# Altium PCB AMC_Single_uBIF.PcbDoc (part 1 of 2)
Units mm, origin at the board's own origin, x right, y up, seen from the top; angles counter-clockwise.
Board outline 54.63 x 82.6 mm, 4 copper layers (TOP, GND, PWR, BTM), stack 1.562 mm thick; 31 components, 112 nets, 322 pads, 154 vias.
Unrouted connection lines stored in the file: 186.
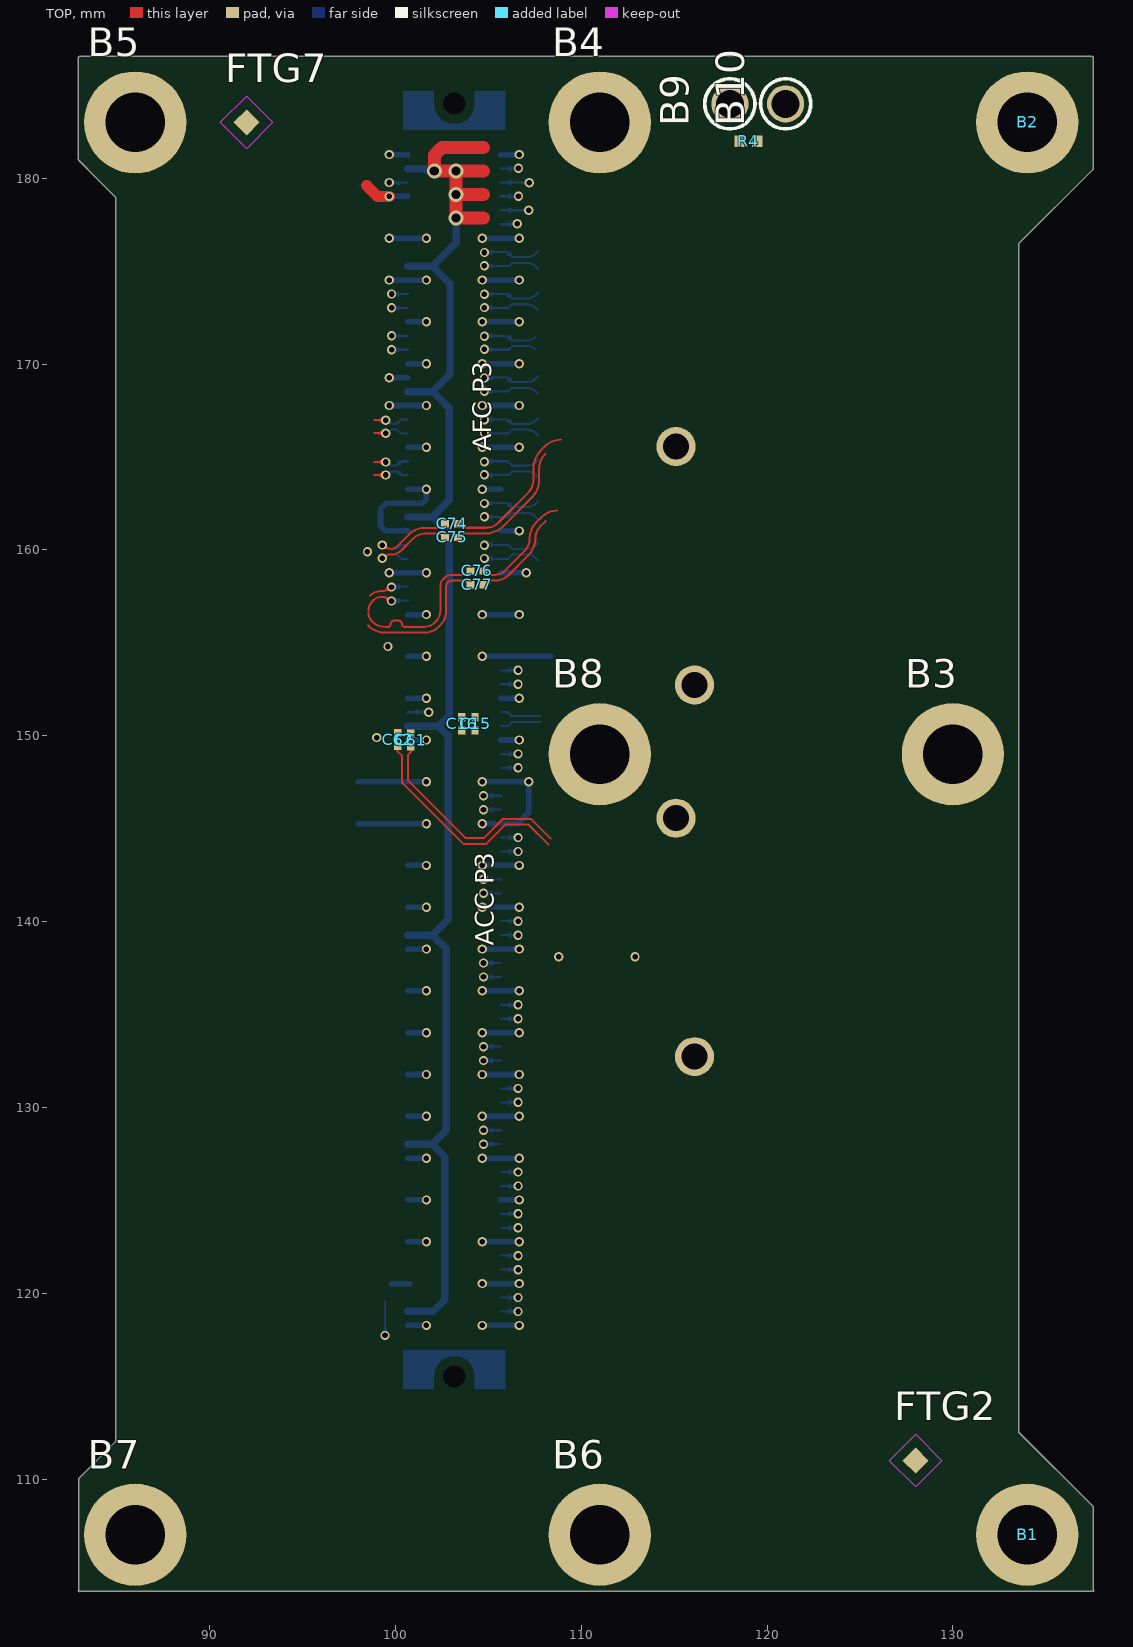
[diagram p0: TOP view]
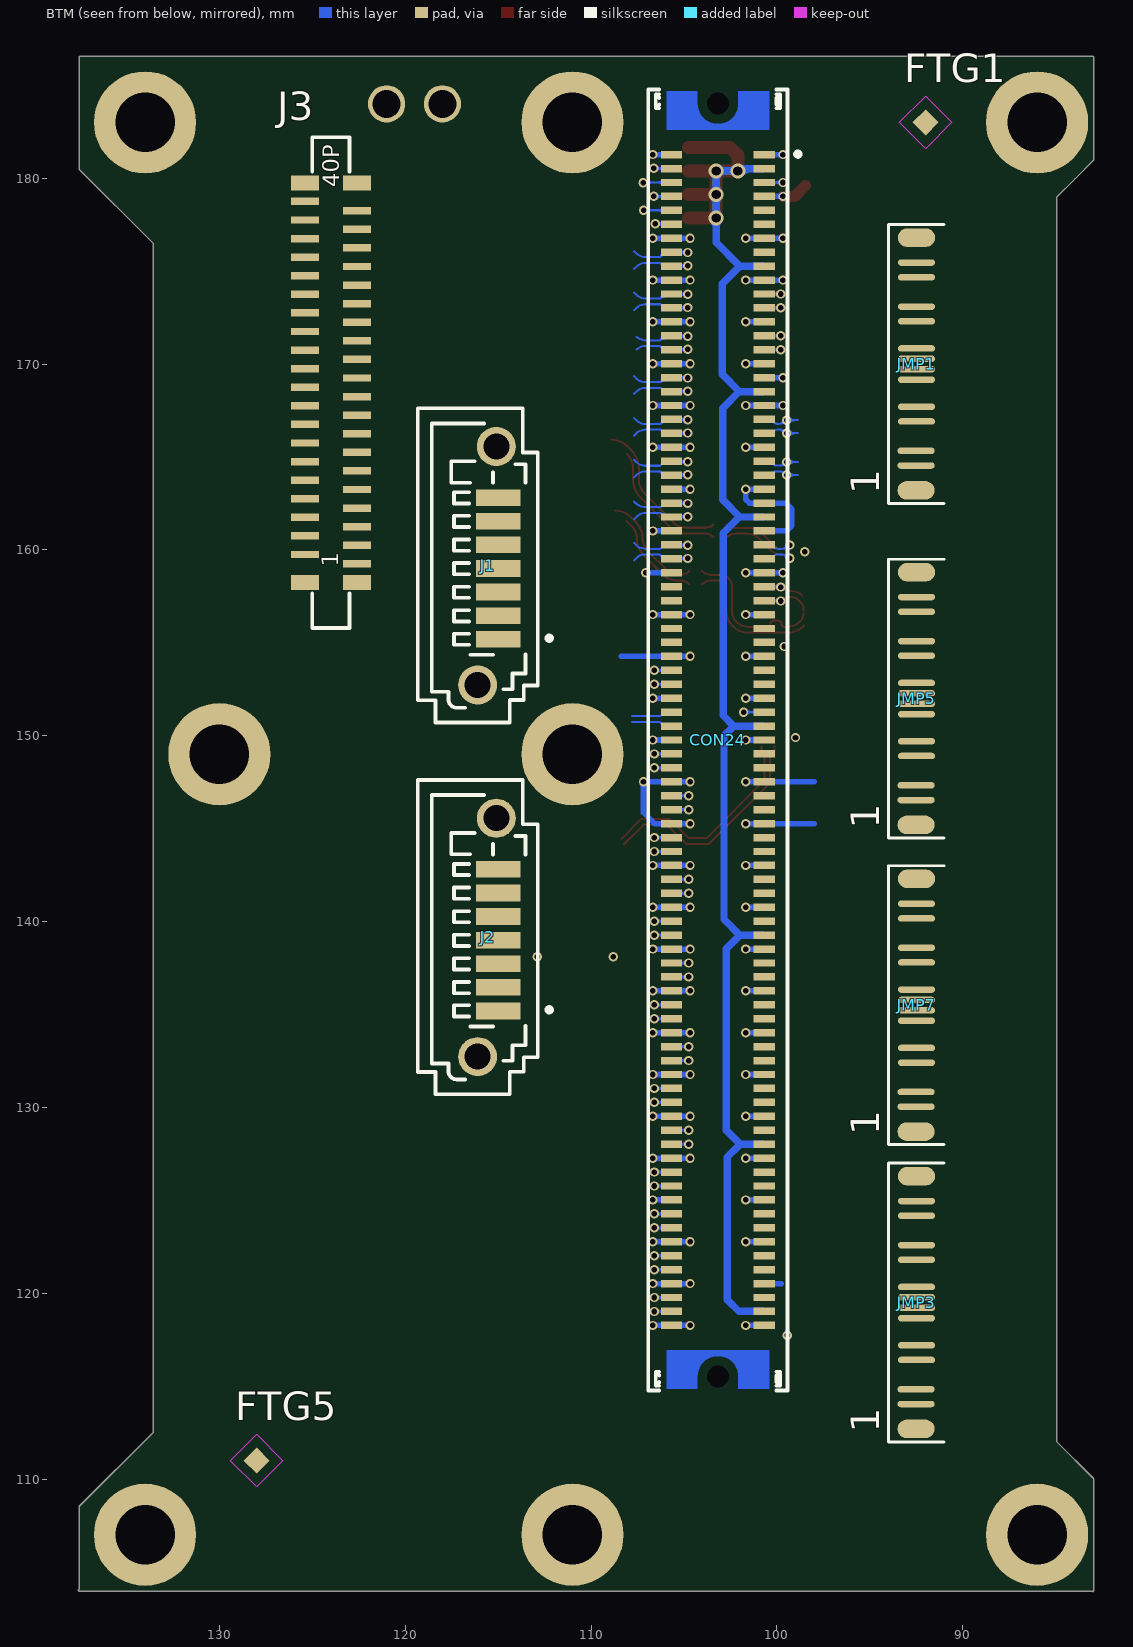
[diagram p1: BTM view, seen from below]
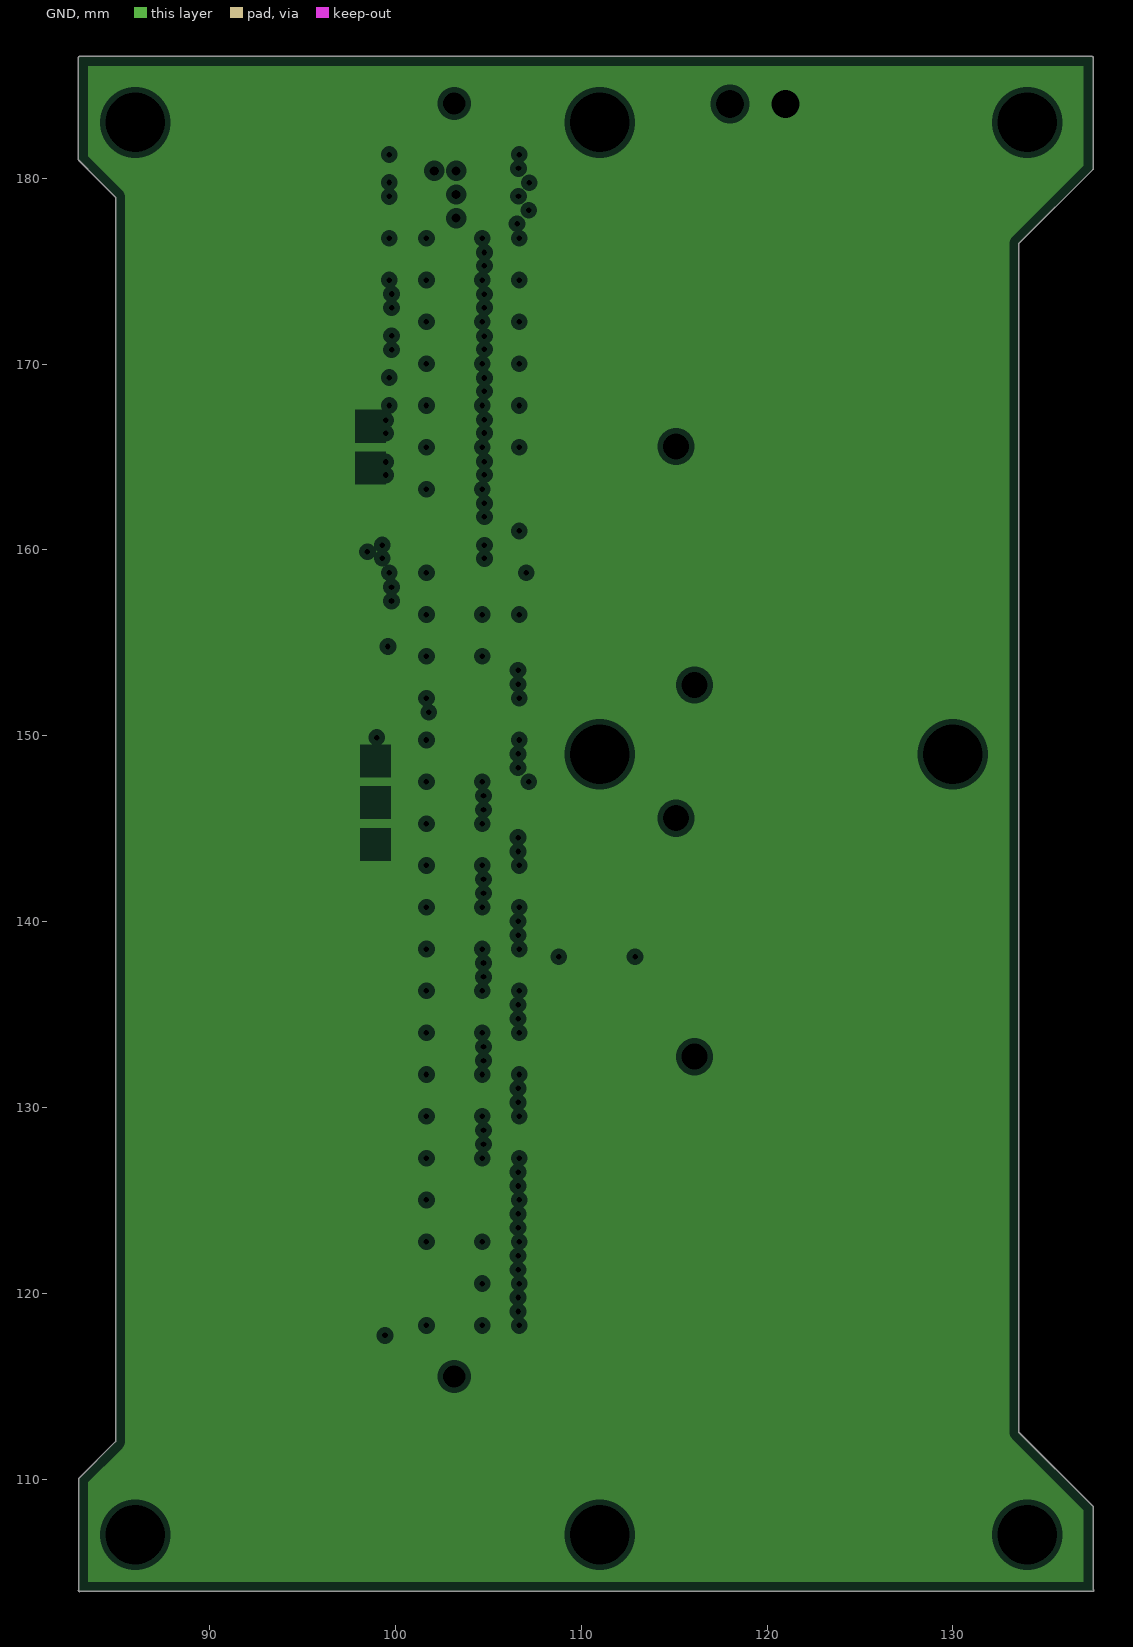
[diagram p2: GND, clearances drawn from the general rule]
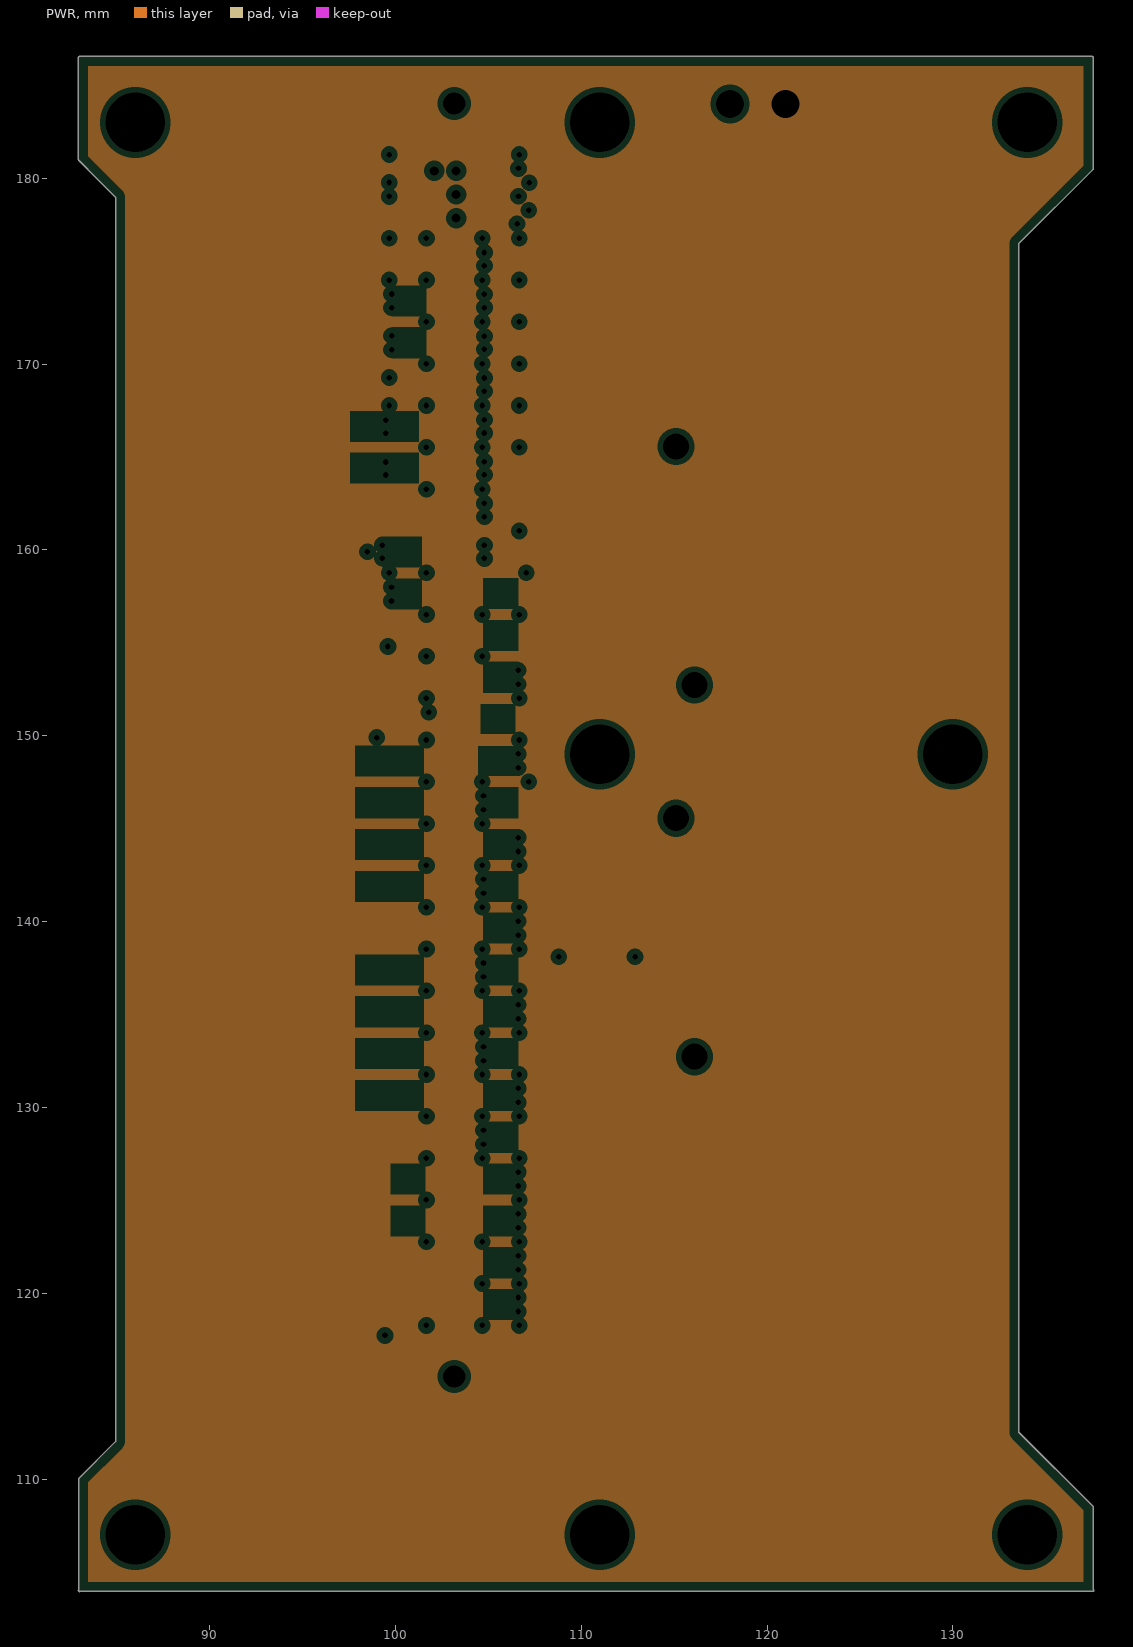
[diagram p3: PWR, clearances drawn from the general rule]

## Layer stack, top to bottom
Top Solder: solder mask 0.012, Solder Resist, Dk 3.5
TOP: signal copper 0.053
Dielectric1: core 0.11, FR4 IT180-A / S1000-2 0.135mm 18u/18u, Dk 4.5
GND: plane copper 0.018, net GND
Dielectric2: prepreg 1.2, FR-4, Dk 4.5
PWR: plane copper 0.018, net GND
Dielectric3: core 0.11, FR4 IT180-A / S1000-2 0.135mm 18u/18u, Dk 4.5
BTM: signal copper 0.053
Bottom Solder: solder mask 0.012, Solder Resist, Dk 3.5

## Board outline
83.032,103.961 cw(c83,104) 82.961,104.032 82.961,110.011 cw(c83.011,110.011) 82.976,110.047 82.975,110.047 84.95,112.021 84.95,178.979 83.965,179.964 cw(c84,180) 83.964,179.964 cw(c84,180) 83.964,179.965 83.965,179.964 82.964,180.964 82.965,180.964 cw(c83,181) 82.95,181 82.95,186.5 cw(c83,186.5) 83,186.55 137.5,186.55 cw(c137.5,186.5) 137.55,186.5 137.55,180.5 cw(c137.5,180.5) 137.535,180.464 137.536,180.464 133.55,176.479 133.55,112.521 137.536,108.536 137.535,108.536 cw(c137.5,108.5) 137.55,108.5 137.55,104.064 137.568,104.047 137.567,104.047 cw(c137.532,104.011) 137.582,104.011 cw(c137.532,104.011) 137.532,103.961

## Design rules (kind name [scope] priority, off if disabled: settings)
AcuteAngle [All] p1: minimum=5.00000000000000E+0001 checktracksonly=FALSE
Clearance Pads_v_pads [InPadClass('All pads') vs InPadClass('All pads')] p1: gap=0.025
Clearance poly_vs_impedance [InNetClass('SE') or InNetClass('DE') vs inpoly] p2: gap=0.5
Clearance DE&SE_in_room [(InNetClass('DE') OR InNetClass('SE')) and iswire and (WithinRoom('QSFPA') OR WithinRoom('QSFPB') OR WithinRoom('SFP0_AFC') OR WithinRoom('SFP0_ACC') OR WithinRoom('SFP1_AFC') OR WithinRoom('SFP1_ACC') OR WithinRoom('CLK') OR WithinRoom('ETH_CON') OR WithinRoom('IO') OR WithinRoom('USB_UART') OR WithinRoom('U_RPTR_1') OR WithinRoom('U_RPTR_2') OR WithinRoom('U_RPTR_3'))] p3: gap=0.15
Clearance DE_vs_DE [InNetClass('DE') and (IsWire) vs InNetClass('DE') and (IsWire)] p4: gap=0.4
Clearance DE_vs_12V [(InDifferentialPairClass('All Differential Pairs')) vs InNet('P12V')] p5: gap=0.4
Clearance DE_vs_rest [InNetClass('DE') and iswire vs iswire and (not InNetClass('DE'))] p6: gap=0.4
Clearance Clearance_ICs [WithinRoom('CPU') OR WithinRoom('ETH_PHY') vs NOT InPoly] p7: gap=0.12
Clearance SE_vs_rest [InNetClass('SE') and iswire vs iswire or inpoly] p8: gap=0.4
Clearance P12V_Clerance [(InNet('ACC_P12V') or InNet('AFC_P12V') or InNet('P12V'))] p9: gap=0.25
Clearance poly_vs_con [InComponent('CON21') vs inpoly] p10: gap=0.3
Clearance poly_vs_power_poly [InPoly AND (InNet('P3V3') OR InNet('P12V') OR InNet('QSFP_P3V3') OR InNet('SFP_P3V3')) vs InPoly] p11: gap=0.4
Clearance poly_vs_rest [All vs inpoly] p12: gap=0.254
Clearance [All] p13: gap=0.12
ComponentClearance [All] p1: gap=0 collisioncheckmode=3 verticalgap=0 showdistances=FALSE
DiffPairsRouting [All] p1: maxlimit=0.2 minlimit=0.2 mostfreqgap=0.2 toplayer_minwidth=0.381 toplayer_maxwidth=0.381 toplayer_prefwidth=0.381 bottomlayer_minwidth=0.381 bottomlayer_maxwidth=0.381 bottomlayer_prefwidth=0.381 maxuncoupledlength=12.7
Height [All] p1: minheight=0 maxheight=30 prefheight=25.4
HoleSize [All] p1: absolutevalues=TRUE maxlimit=10 minlimit=0.3 maxpercent=80.000 minpercent=20.000
HoleToHoleClearance [All] p1: gap=0.2 allowstackedmicrovias=FALSE
MinimumAnnularRing [All] p1: minimumring=0.1
MinimumSolderMaskSliver [All] p1: minsoldermaskwidth=0.051
PlaneClearance V_SE [InNetClass('SE')] p1: clearance=0.3
PlaneClearance V_DE [InNetClass('DE')] p2: clearance=0.31
PlaneClearance REST_Clearance [All] p3: clearance=0.3
PlaneConnect PlaneConnect_pad [InPadClass('All pads')] p1: planeconnectstyle=Relief reliefexpansion=0.2 reliefentries=4 reliefconductorwidth=0.5 reliefairgap=0.2
PlaneConnect [All] p2: planeconnectstyle=Direct reliefexpansion=0.508 reliefentries=4 reliefconductorwidth=0.254 reliefairgap=0.254
PolygonConnect PolygonConnect_Vias [IsVIa] p1: connectstyle=Direct reliefconductorwidth=0.254 reliefentries=4 polygonreliefangle="90 Angle" airgapwidth=0.254
PolygonConnect [All] p2: connectstyle=Relief reliefconductorwidth=0.25 reliefentries=4 polygonreliefangle="90 Angle" airgapwidth=0.254
RoomDefinition AMC_BOX_Backplane [InComponentClass('AMC_BOX_Backplane')] p1: confinementstyle=ConfineIn formatcopy=TRUE lockcomponents=FALSE outline 1213.076,953.689 1230.296,953.689 1230.296,957.779 1213.076,957.779
RoomDefinition AFC [InComponentClass('AFC')] p2: confinementstyle=ConfineIn formatcopy=TRUE lockcomponents=FALSE outline 92,95 110,95 110,102 92,102
RoutingVias [All] p1: holewidth=0.3 width=0.5 viastyle="Through Hole" minholewidth=0.3 minwidth=0.5 maxholewidth=2 maxwidth=2
SilkToSilkClearance [All] p1: silktosilkclearance=0.025
SilkToSolderMaskClearance SilkscreenOverComponentPads [IsPad] p1: minsilkscreentomaskgap=0.025 clearancetoexposedcopper=TRUE
SolderMaskExpansion [All] p1: expansion=0.051
ViasUnderSMD [All] p1: allowed=FALSE
Width POWER_WIDTH [InNetClass('POWER')] p1: maxlimit=10 minlimit=0.2 preferedwidth=0.2 minimp=50.000000 maximp=50.000000 favimp=50.000000
Width SE [InNetClass('SE')] p2: maxlimit=0.13 minlimit=0.13 preferedwidth=0.13 minimp=50.000000 maximp=50.000000 favimp=50.000000
Width DE100 [(InDifferentialPairClass('All Differential Pairs'))] p3: maxlimit=0.11 minlimit=0.11 preferedwidth=0.11 minimp=50.000000 maximp=50.000000 favimp=50.000000
Width [All] p4: maxlimit=10 minlimit=0.11 preferedwidth=0.2
20 further rules are at their usual default settings.

## Classes and differential pairs
net class DE: BA4_CLK_N FCLKA_N FCLKA_P RX0_N RX0_P RX1_N RX1_P RX2_C_N RX2_C_P RX2_N RX2_P RX3_C_N RX3_C_P RX3_N RX3_P RX4_N RX4_P RX5_N RX5_P RX6_N RX6_P RX7_N RX7_P TCLKA_N TCLKA_P TCLKB_N TCLKB_P TX0_N TX0_P TX1_N TX1_P TX2_C_N TX2_C_P TX2_N TX2_P TX3_C_N TX3_C_P TX3_N TX3_P TX4_N TX4_P TX5_N TX5_P TX6_N TX6_P TX7_N TX7_P
component class AFC: B1 B2 C15 C16 C61 C62 C74 C75 C76 C77 CON24 J1 J2
net class AMC_CTRL: ENABLE# PS0# PS1# SCL_L SDA_L
net class SATA: RX2_C_N RX2_C_P RX2_N RX2_P RX3_C_N RX3_C_P RX3_N RX3_P TX2_C_N TX2_C_P TX2_N TX2_P TX3_C_N TX3_C_P TX3_N TX3_P
net class SFP: FCLKA_N FCLKA_P RX0_N RX0_P RX1_N RX1_P RX4_N RX4_P RX5_N RX5_P RX6_N RX6_P RX7_N RX7_P TCLKA_N TCLKA_P TCLKB_N TCLKB_P TX0_N TX0_P TX1_N TX1_P TX4_N TX4_P TX5_N TX5_P TX6_N TX6_P TX7_N TX7_P
component class AMC_BOX_Backplane: B3 B4 B5 B6 B7 B8 B9 B10 CON1 CON12 CON28 FTG1 FTG2 FTG5 FTG7 J3 JMP1 JMP3 JMP5 JMP7 R4
differential pair FCLKA: +FCLKA_P -FCLKA_N
differential pair RX0: +RX0_P -RX0_N
differential pair RX1: +RX1_P -RX1_N
differential pair RX2_C: +RX2_C_P -RX2_C_N
differential pair RX2: +RX2_P -RX2_N
differential pair RX4: +RX4_P -RX4_N
differential pair RX5: +RX5_P -RX5_N
differential pair RX6: +RX6_P -RX6_N
differential pair RX7: +RX7_P -RX7_N
differential pair RX8: +RX8_P -RX8_N
differential pair RX9: +RX9_P -RX9_N
differential pair RX10: +RX10_P -RX10_N
differential pair RX11: +RX11_P -RX11_N
differential pair RX12: +RX12_P -RX12_N
differential pair RX13: +RX13_P -RX13_N
differential pair RX14: +RX14_P -RX14_N
differential pair RX15: +RX15_P -RX15_N
differential pair RX17: +RX17_P -RX17_N
differential pair RX18: +RX18_P -RX18_N
differential pair RX19: +RX19_P -RX19_N
differential pair RX20: +RX20_P -RX20_N
differential pair TCLKA: +TCLKA_P -TCLKA_N
differential pair TCLKB: +TCLKB_P -TCLKB_N
differential pair TCLKC: +TCLKC_P -TCLKC_N
differential pair TCLKD: +TCLKD_P -TCLKD_N
differential pair TX0: +TX0_P -TX0_N
differential pair TX1: +TX1_P -TX1_N
differential pair TX2_C: +TX2_C_P -TX2_C_N
differential pair TX2: +TX2_P -TX2_N
differential pair TX4: +TX4_P -TX4_N
differential pair TX5: +TX5_P -TX5_N
differential pair TX6: +TX6_P -TX6_N
differential pair TX7: +TX7_P -TX7_N
differential pair TX8: +TX8_P -TX8_N
differential pair TX9: +TX9_P -TX9_N
differential pair TX10: +TX10_P -TX10_N
differential pair TX11: +TX11_P -TX11_N
differential pair TX12: +TX12_P -TX12_N
differential pair TX13: +TX13_P -TX13_N
differential pair TX14: +TX14_P -TX14_N
differential pair TX15: +TX15_P -TX15_N
differential pair TX17: +TX17_P -TX17_N
differential pair TX18: +TX18_P -TX18_N
differential pair TX19: +TX19_P -TX19_N
differential pair TX20: +TX20_P -TX20_N
differential pair RX3_C: +RX3_C_P -RX3_C_N
differential pair RX3: +RX3_P -RX3_N
differential pair TX3_C: +TX3_C_P -TX3_C_N
differential pair TX3: +TX3_P -TX3_N

## Components (designator, comment, footprint, x,y, rotation, side; value= is the part's Value field where it differs from the comment)
B1 "Plated Hole" MTG320_550 134,107 r0 top
B2 "Plated Hole" MTG320_550 134,183 r0 top
B3 "Plated Hole" MTG320_550 130,149 r0 top
B4 "Plated Hole" MTG320_550 111,183 r0 top
B5 "Plated Hole" MTG320_550 86,183 r0 top
B6 "Plated Hole" MTG320_550 111,107 r0 top
B7 "Plated Hole" MTG320_550 86,107 r0 top
B8 "Plated Hole" MTG320_550 111,149 r0 top
B9 "Plated Hole" c200h150 118,184 r90 top
B10 "Plated Hole" c200h150 121,184 r90 top
C15 "100nF" CAPC0603X33N 104.288,150.649 r90 top
C16 "100nF" CAPC0603X33N 103.577,150.649 r90 top
C61 "100nF" CAPC0603X33N 100.839,149.77 r90 top
C62 "100nF" CAPC0603X33N 100.128,149.795 r90 top
C74 "100nF" CAPC0603X33N 103.022,161.404 r180 top
C75 "100nF" CAPC0603X33N 103.022,160.667 r180 top
C76 "100nF" CAPC0603X33N 104.394,158.864 r180 top
C77 "100nF" CAPC0603X33N 104.394,158.127 r180 top
CON24 "SAMTEC_MTCA-085-02-S-DV-SMT-K-TR" SAMTEC_MTCA-085-02-S-DV-SMT-K-TR 103.174,149.77 r90 bottom locked
FTG1 "Use only in PCB" FIDUCIAL_TOP_S100-200 92,183 r90 bottom
FTG2 "Use only in PCB" FIDUCIAL_TOP_S100-200 128,111 r90 top
FTG5 "Use only in PCB" FIDUCIAL_TOP_S100-200 128,111 r90 bottom
FTG7 "Use only in PCB" FIDUCIAL_TOP_S100-200 92,183 r90 top
J1 "SATA" MOLEX_67800-5005 115,159 r90 bottom
J2 "SATA" MOLEX_67800-5005 115,139 r90 bottom
J3 "687340124422" 687340124422 124,169 r90 bottom
JMP1 "3M_Twinax_SL8801/12-10DA5-00" 3M_Twinax_SL8801/12-10DA5-00 92.5,170 r90 bottom
JMP3 "3M_Twinax_SL8801/12-10DA5-00" 3M_Twinax_SL8801/12-10DA5-00 92.5,119.5 r90 bottom
JMP5 "3M_Twinax_SL8801/12-10DA5-00" 3M_Twinax_SL8801/12-10DA5-00 92.5,152 r90 bottom
JMP7 "3M_Twinax_SL8801/12-10DA5-00" 3M_Twinax_SL8801/12-10DA5-00 92.5,135.5 r90 bottom
R4 "0" RESC1005X40N 119,182 r0 top

## Footprints (in the part's own frame and the unit in brackets; to place one, negate y for a bottom-side part, rotate by r counter-clockwise, add the part's x,y. Pads: shape width x height; smd on the part's side, far side on the other; paste and mask are expansions set on the pad)
3M_Twinax_SL8801/12-10DA5-00 [mm]
  oval 1x2 smd: 1(-6.8,0.011) 14(6.8,-0.011)
  oval 0.35x2 smd: 2(-5.46,0.011) 3(-4.67,0.011) 4(-3.09,-0.011) 5(-2.3,-0.011) 6(-0.84,-0.011) 7(-0.28,-0.011) 8(0.28,-0.011) 9(0.84,-0.011) 10(2.3,-0.011) 11(3.09,-0.011) 12(4.67,-0.011) 13(5.46,-0.011)
  silkscreen extent -7.5,-1.5 7.5,1.5
687340124422 [mm] "0.50 mm SMT ZIF Vertical, 40p"
  rect 0.4x1.5 smd: 1(-9.75,-1.4) 2(-9.25,1.4) 3(-8.75,-1.4) 4(-8.25,1.4) 5(-7.75,-1.4) 6(-7.25,1.4) 7(-6.75,-1.4) 8(-6.25,1.4) 9(-5.75,-1.4) 10(-5.25,1.4) 11(-4.75,-1.4) 12(-4.25,1.4) 13(-3.75,-1.4) 14(-3.25,1.4) 15(-2.75,-1.4) 16(-2.25,1.4) 17(-1.75,-1.4) 18(-1.25,1.4) 19(-0.75,-1.4) 20(-0.25,1.4) 21(0.25,-1.4) 22(0.75,1.4) 23(1.25,-1.4) 24(1.75,1.4) 25(2.25,-1.4) 26(2.75,1.4) 27(3.25,-1.4) 28(3.75,1.4) 29(4.25,-1.4) 30(4.75,1.4) 31(5.25,-1.4) 32(5.75,1.4) 33(6.25,-1.4) 34(6.75,1.4) 35(7.25,-1.4) 36(7.75,1.4) 37(8.25,-1.4) 38(8.75,1.4) 39(9.25,-1.4) 40(9.75,1.4)
  rect 0.8x1.5 smd: ""(-10.75,-1.4) ""(-10.75,1.4) ""(10.75,-1.4) ""(10.75,1.4)
  silkscreen extent -13.2,-1 13.2,1, body extent -13.2,-1.75 13.2,1.75, height 4.92
c200h150 [mm] "Plated Through Hole: Hole Dia.=1.5mm Pad Dia.=2.0mm, IPC-7251 Level C"
  round 2 hole 1.5: 1(0,0)
  silkscreen extent -1.35,-1.35 1.35,1.35
CAPC0603X33N [mm] "Chip Capacitor, Body 0.6x0.30mm, IPC Medium Density"
  rect 0.45x0.4 smd: 1(-0.35,0) 2(0.35,0)
  body extent -0.31,-0.16 0.32,0.17, height 0.33
FIDUCIAL_TOP_S100-200 [mm] "Scare Fiducial Target, Top Layer, 1.0mm, Top Sloder 2.0mm, Keepout =2.0mm"
  rect 1x1 smd rot 45 paste-0.51 mask+0.5: 1(0,0)
  TOP keep-out region: 1.414,0 0,-1.414 -1.414,0 0,1.414
MOLEX_67800-5005 [mm] "1.27mm Pitch, 7 Contacts, Serial ATA High Speed Header, Straight with Locking Latch"
  rect 0.9x2.4 smd: 1(-3.81,0) 2(-2.54,0) 3(-1.27,0) 4(0,0) 5(1.27,0) 6(2.54,0) 7(3.81,0)
  round 2.1 hole 1.4: MECH1(-6.27,1.1) MECH2(6.56,0.1)
  silkscreen extent -8.28,-2.87 8.61,4.33, body extent -8.28,-2.12 8.62,4.33, height 8.4
MTG320_550 [mm] "Plated Through Hole: Hole Dia.=3.2mm Pad Dia.=5.5mm"
  round 5.5 hole 3.2: 1(0,0)
RESC1005X40N [mm] "Chip Resistor, EIA 0402, Metric 1005, Body 1.0x0.5mm, IPC Medium Density"
  rect 0.58x0.62 smd: 1(-0.47,0) 2(0.47,0)
  body extent -0.52,-0.27 0.53,0.28, height 0.4
SAMTEC_MTCA-085-02-S-DV-SMT-K-TR [mm] "170 Contacts, Pitch 0.75mm, Micro TCA Connector"
  rect 0.4x1.15 smd: 1(31.5,-2.5) 2(30.75,-2.5) 3(30,-2.5) 4(29.25,-2.5) 5(28.5,-2.5) 6(27.75,-2.5) 7(27,-2.5) 8(26.25,-2.5) 9(25.5,-2.5) 10(24.75,-2.5) 11(24,-2.5) 12(23.25,-2.5) 13(22.5,-2.5) 14(21.75,-2.5) 15(21,-2.5) 16(20.25,-2.5) 17(19.5,-2.5) 18(18.75,-2.5) 19(18,-2.5) 20(17.25,-2.5) 21(16.5,-2.5) 22(15.75,-2.5) 23(15,-2.5) 24(14.25,-2.5) 25(13.5,-2.5) 26(12.75,-2.5) 27(12,-2.5) 28(11.25,-2.5) 29(10.5,-2.5) 30(9.75,-2.5) 31(9,-2.5) 32(8.25,-2.5) 33(7.5,-2.5) 34(6.75,-2.5) 35(6,-2.5) 36(5.25,-2.5) 37(4.5,-2.5) 38(3.75,-2.5) 39(3,-2.5) 40(2.25,-2.5) 41(1.5,-2.5) 42(0.75,-2.5) 43(0,-2.5) 44(-0.75,-2.5) 45(-1.5,-2.5) 46(-2.25,-2.5) 47(-3,-2.5) 48(-3.75,-2.5) 49(-4.5,-2.5) 50(-5.25,-2.5) 51(-6,-2.5) 52(-6.75,-2.5) 53(-7.5,-2.5) 54(-8.25,-2.5) 55(-9,-2.5) 56(-9.75,-2.5) 57(-10.5,-2.5) 58(-11.25,-2.5) 59(-12,-2.5) 60(-12.75,-2.5) 61(-13.5,-2.5) 62(-14.25,-2.5) 63(-15,-2.5) 64(-15.75,-2.5) 65(-16.5,-2.5) 66(-17.25,-2.5) 67(-18,-2.5) 68(-18.75,-2.5) 69(-19.5,-2.5) 70(-20.25,-2.5) 71(-21,-2.5) 72(-21.75,-2.5) 73(-22.5,-2.5) 74(-23.25,-2.5) 75(-24,-2.5) 76(-24.75,-2.5) 77(-25.5,-2.5) 78(-26.25,-2.5) 79(-27,-2.5) 80(-27.75,-2.5) 81(-28.5,-2.5) 82(-29.25,-2.5) 83(-30,-2.5) 84(-30.75,-2.5) 85(-31.5,-2.5) 86(-31.5,2.5) 87(-30.75,2.5) 88(-30,2.5) 89(-29.25,2.5) 90(-28.5,2.5) 91(-27.75,2.5) 92(-27,2.5) 93(-26.25,2.5) 94(-25.5,2.5) 95(-24.75,2.5) 96(-24,2.5) 97(-23.25,2.5) 98(-22.5,2.5) 99(-21.75,2.5) 100(-21,2.5) 101(-20.25,2.5) 102(-19.5,2.5) 103(-18.75,2.5) 104(-18,2.5) 105(-17.25,2.5) 106(-16.5,2.5) 107(-15.75,2.5) 108(-15,2.5) 109(-14.25,2.5) 110(-13.5,2.5) 111(-12.75,2.5) 112(-12,2.5) 113(-11.25,2.5) 114(-10.5,2.5) 115(-9.75,2.5) 116(-9,2.5) 117(-8.25,2.5) 118(-7.5,2.5) 119(-6.75,2.5) 120(-6,2.5) 121(-5.25,2.5) 122(-4.5,2.5) 123(-3.75,2.5) 124(-3,2.5) 125(-2.25,2.5) 126(-1.5,2.5) 127(-0.75,2.5) 128(0,2.5) 129(0.75,2.5) 130(1.5,2.5) 131(2.25,2.5) 132(3,2.5) 133(3.75,2.5) 134(4.5,2.5) 135(5.25,2.5) 136(6,2.5) 137(6.75,2.5) 138(7.5,2.5) 139(8.25,2.5) 140(9,2.5) 141(9.75,2.5) 142(10.5,2.5) 143(11.25,2.5) 144(12,2.5) 145(12.75,2.5) 146(13.5,2.5) 147(14.25,2.5) 148(15,2.5) 149(15.75,2.5) 150(16.5,2.5) 151(17.25,2.5) 152(18,2.5) 153(18.75,2.5) 154(19.5,2.5) 155(20.25,2.5) 156(21,2.5) 157(21.75,2.5) 158(22.5,2.5) 159(23.25,2.5) 160(24,2.5) 161(24.75,2.5) 162(25.5,2.5) 163(26.25,2.5) 164(27,2.5) 165(27.75,2.5) 166(28.5,2.5) 167(29.25,2.5) 168(30,2.5) 169(30.75,2.5) 170(31.5,2.5)
  round 1 hole 1.2 unplated mask+0.1: 171(-34.25,0) 172(34.25,0)
  TOP region: -34.9,-2.75 -34.9,-1.1 -34.25,-1.1 -33.7,-0.953 -33.297,-0.55 -33.15,0 -33.297,0.55 -33.7,0.953 -34.25,1.1 -34.25,1.1 -34.9,1.1 -34.9,2.75 -32.85,2.75 -32.85,-2.75
  TOP region: 34.9,2.75 34.9,1.1 34.25,1.1 33.7,0.953 33.297,0.55 33.15,0 33.297,-0.55 33.7,-0.953 34.25,-1.1 34.25,-1.1 34.9,-1.1 34.9,-2.75 32.85,-2.75 32.85,2.75
  silkscreen extent -35,-4.42 35,3.75, body extent -35,-3.75 35,3.75, height 12.85

## Part data
B1 B2 B3 B4 B5 B6 B7 B8: library part PLATED_HOLE3.2_PAD5.5, "Single Terminal Socket"
B9 B10: library part PLATED_HOLE1.5_PAD2.0, "Single Terminal Socket"
C15 C16 C61 C62 C74 C75 C76 C77: library part CC0201_100NF_6.3V_10%_X5R, "Non-polarised capacitor"
CON24: "170 Poles,  Micro TCA (Telecom Computing Architecture) Edge Card Socket"
FTG1 FTG2 FTG5 FTG7: library part FIDUCIAL_TARGET_S100-200, "Fiducial Target"
J1 J2: library part MOLEX_67800-5005, "7 Pin SATA Receptacle"
J3: "0.50 mm SMT ZIF Vertical WR-FPC, 40 pins"
JMP1 JMP3 JMP5 JMP7: library part CBL_TWINAX_3M_4pairs_SB, "Flat Ribbon Cable Silver 8 (4 Pair) Conductors 0.093\" (2.37mm) Between Pairs Flat Twin Axial 500.0' (152.40m)"
R4: library part R0402_0R_JUMPER, "Resistor"

## Via types
v1: diameter 0.5, hole 0.3, TOP to BTM, tented both sides, 150 vias
v2: diameter 0.8, hole 0.5, TOP to BTM, tented both sides, 4 vias

## Nets (pads, with @x,y where several pads share a name; then routed paths per layer and width w, separated by ;. In a path a pad name is that pad's centre, name@x,y a point inside that pad or via, vN(x,y) a via of type N, cw(c..) or ccw(c..) an arc to the next point about the centre after c; other vN are vias at no path point)
AMC_MP3V3: CON24.4 JMP3.9
AMC_P12V: B9.1 CON24.2 CON24.9 CON24.18 CON24.27 CON24.42 CON24.57 CON24.72 CON24.84
ENABLE#: CON24.41 JMP3.6
FCLKA_N: CON24.81 JMP3.4
FCLKA_P: CON24.80 JMP3.5
GA0: CON24.5 CON24.17 CON24.26 R4.1 | length 1
  BTM w0.3: v1(99.673,169.27) CON24.17@100.674,169.27
GND: B10.1 CON24.1 CON24.7 CON24.10 CON24.13 CON24.16 CON24.19 CON24.22 CON24.25 CON24.28 CON24.31 CON24.34 CON24.37 CON24.40 CON24.43 CON24.46 CON24.49 CON24.52 CON24.55 CON24.58 CON24.61 CON24.64 CON24.67 CON24.70 CON24.73 CON24.76 CON24.79 CON24.82 CON24.85 CON24.86 CON24.89 CON24.92 CON24.95 CON24.98 CON24.101 CON24.104 CON24.107 CON24.110 CON24.113 CON24.116 CON24.119 CON24.122 CON24.125 CON24.128 CON24.131 CON24.134 CON24.137 CON24.140 CON24.143 CON24.146 CON24.149 CON24.152 CON24.155 CON24.158 CON24.161 CON24.164 CON24.170 J1.1 J1.4 J1.7 J2.1 J2.4 J2.7 J3.1 J3.2 J3.3 J3.6 J3.7 J3.10 J3.11 J3.14 J3.15 J3.18 J3.19 J3.22 J3.23 J3.26 J3.27 J3.30 J3.31 J3.34 J3.35 J3.37 J3.38 J3.39 J3.40 JMP1.1 JMP1.14 JMP3.1 JMP3.14 JMP5.1 JMP5.14 JMP7.1 JMP7.14 R4.2
PS0#: CON24.83 JMP3.8
PS1#: CON24.3 JMP3.7
RX0_N: CON24.15 JMP1.10
RX0_P: CON24.14 JMP1.11
RX1_N: CON24.24 JMP1.2
RX1_P: CON24.23 JMP1.3
RX2_C_N: C76.1 J1.3
RX2_C_P: C77.1 J1.2
RX2_N: C76.2 CON24.33
RX2_P: C77.2 CON24.32
RX3_C_N: C61.1 J2.3 | length 11.7
  TOP w0.11: C61.1@100.839,149.42 100.839,149.123 100.674,148.958 100.674,147.598 103.784,144.488 104.753,144.488 105.794,145.529 107.292,145.529 108.356,144.465
RX3_C_P: C62.1 J2.2 | length 12.2
  TOP w0.11: C62.1@100.128,149.445 100.128,149.148 100.364,148.912 100.364,147.47 103.656,144.178 104.881,144.178 105.923,145.219 107.164,145.219 108.228,144.155
RX3_N: C61.2 CON24.39
RX3_P: C62.2 CON24.38
RX4_N: CON24.48 JMP5.10
RX4_P: CON24.47 JMP5.11
RX5_N: CON24.54 JMP5.2
RX5_P: CON24.53 JMP5.3
RX6_N: CON24.63 JMP7.10
RX6_P: CON24.62 JMP7.11
RX7_N: CON24.69 JMP7.2
RX7_P: CON24.68 JMP7.3
RX8_N: CON24.87
RX8_P: CON24.88
RX9_N: CON24.93
RX9_P: CON24.94
RX10_N: CON24.99
RX10_P: CON24.100
RX11_N: CON24.105
RX11_P: CON24.106
RX12_N: CON24.111
RX12_P: CON24.112
RX13_N: CON24.117
RX13_P: CON24.118
RX14_N: CON24.123
RX14_P: CON24.124
RX15_N: CON24.129
RX15_P: CON24.130
RX17_N: CON24.141 J3.5
RX17_P: CON24.142 J3.4
RX18_N: CON24.147 J3.9
RX18_P: CON24.148 J3.8
RX19_N: CON24.153 J3.13
RX19_P: CON24.154 J3.12
RX20_N: CON24.159 J3.17
RX20_P: CON24.160 J3.16
SCL_L: CON24.56 JMP3.3
SDA_L: CON24.71 JMP3.2
TCK: CON24.165 JMP1.9 JMP5.9 JMP7.9
TCLKA_N: CON24.75 JMP3.12
TCLKA_P: CON24.74 JMP3.13
TCLKB_N: CON24.78 JMP3.10
TCLKB_P: CON24.77 JMP3.11
TCLKC_N: CON24.135
TCLKC_P: CON24.136
TCLKD_N: CON24.138
TCLKD_P: CON24.139
TDI: CON24.169 JMP1.8 JMP5.8 JMP7.8
TDO: CON24.168 JMP1.7 JMP5.7 JMP7.7
TMS: CON24.166 JMP1.6 JMP5.6 JMP7.6
TRST#: CON24.167 J3.36
TX0_N: CON24.12 JMP1.13
TX0_P: CON24.11 JMP1.12
TX1_N: CON24.21 JMP1.5
TX1_P: CON24.20 JMP1.4
TX2_C_N: C75.1 J1.5
TX2_C_P: C74.1 J1.6
TX2_N: C75.2 CON24.30
TX2_P: C74.2 CON24.29
TX3_C_N: C16.1 J2.5
TX3_C_P: C15.1 J2.6
TX3_N: C16.2 CON24.36
TX3_P: C15.2 CON24.35
TX4_N: CON24.45 JMP5.13
TX4_P: CON24.44 JMP5.12
TX5_N: CON24.51 JMP5.5
TX5_P: CON24.50 JMP5.4
TX6_N: CON24.60 JMP7.13
TX6_P: CON24.59 JMP7.12
TX7_N: CON24.66 JMP7.5
TX7_P: CON24.65 JMP7.4
TX8_N: CON24.90
TX8_P: CON24.91
TX9_N: CON24.96
TX9_P: CON24.97
TX10_N: CON24.102
TX10_P: CON24.103
TX11_N: CON24.108
TX11_P: CON24.109
TX12_N: CON24.114
TX12_P: CON24.115
TX13_N: CON24.120
TX13_P: CON24.121
TX14_N: CON24.126
TX14_P: CON24.127
TX15_N: CON24.132
TX15_P: CON24.133
TX17_N: CON24.144 J3.20
TX17_P: CON24.145 J3.21
TX18_N: CON24.150 J3.24
TX18_P: CON24.151 J3.25
TX19_N: CON24.156 J3.28
TX19_P: CON24.157 J3.29
TX20_N: CON24.162 J3.32
TX20_P: CON24.163 J3.33
pads on no net: B1.1 B2.1 B3.1 B4.1 B5.1 B6.1 B7.1 B8.1 CON24.6 CON24.8 CON24.171 CON24.172 FTG1.1 FTG2.1 FTG5.1 FTG7.1 J1.MECH1 J1.MECH2 J2.MECH1 J2.MECH2 J3.